# EAGLE board RDN (EAGLE 9.6.2)
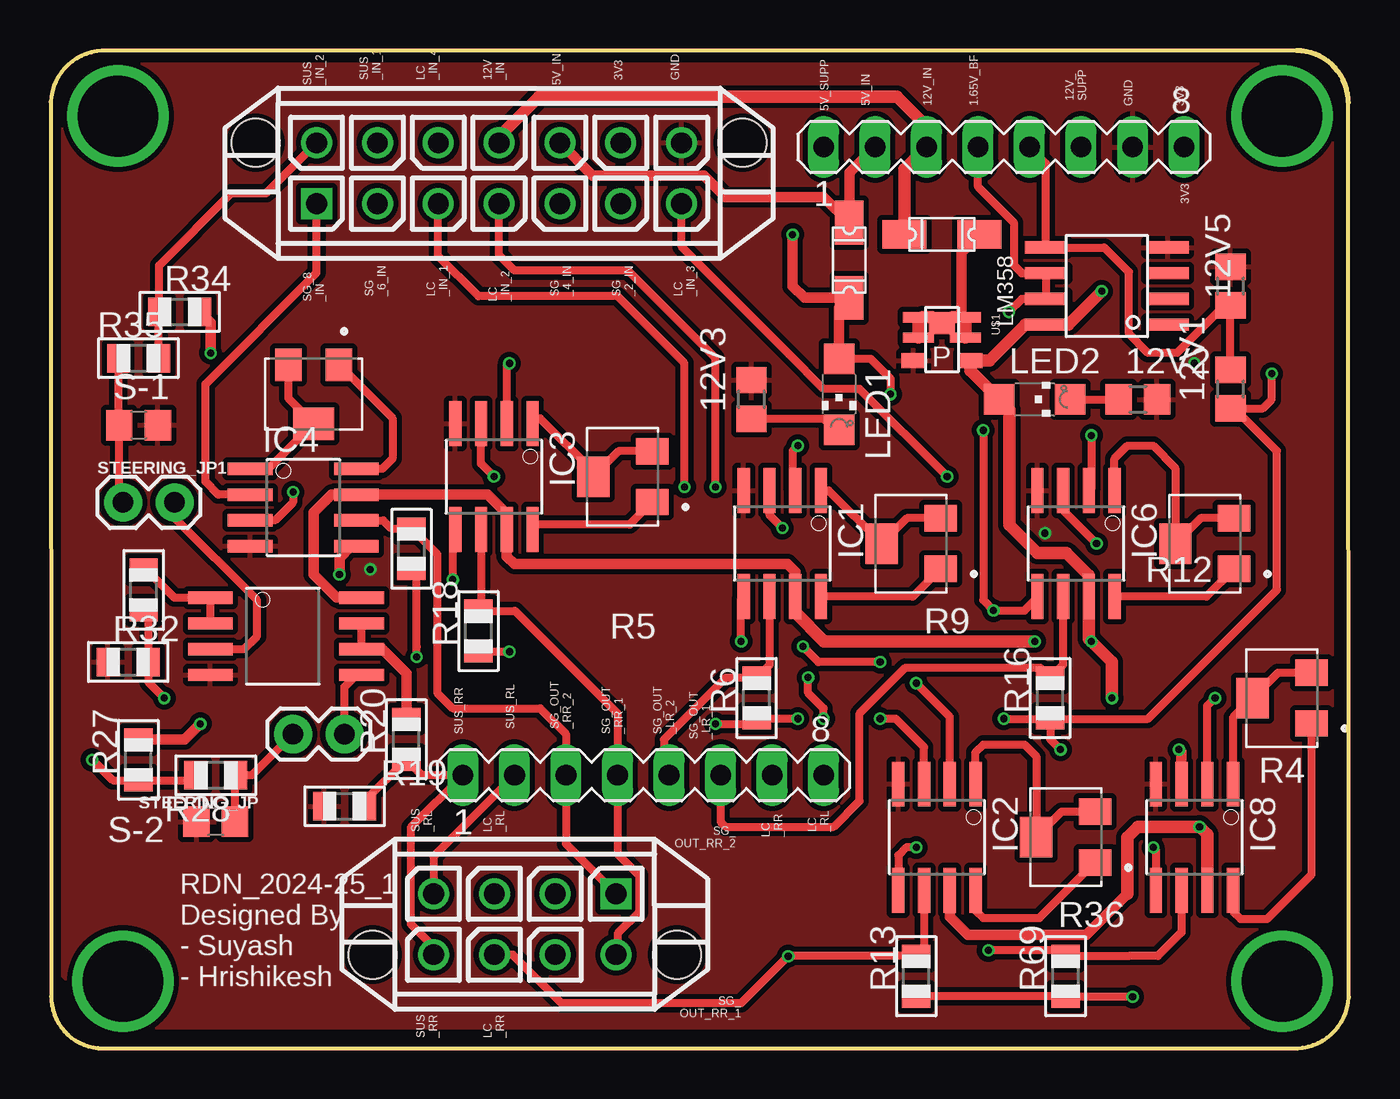
[diagram p0: board, top side]
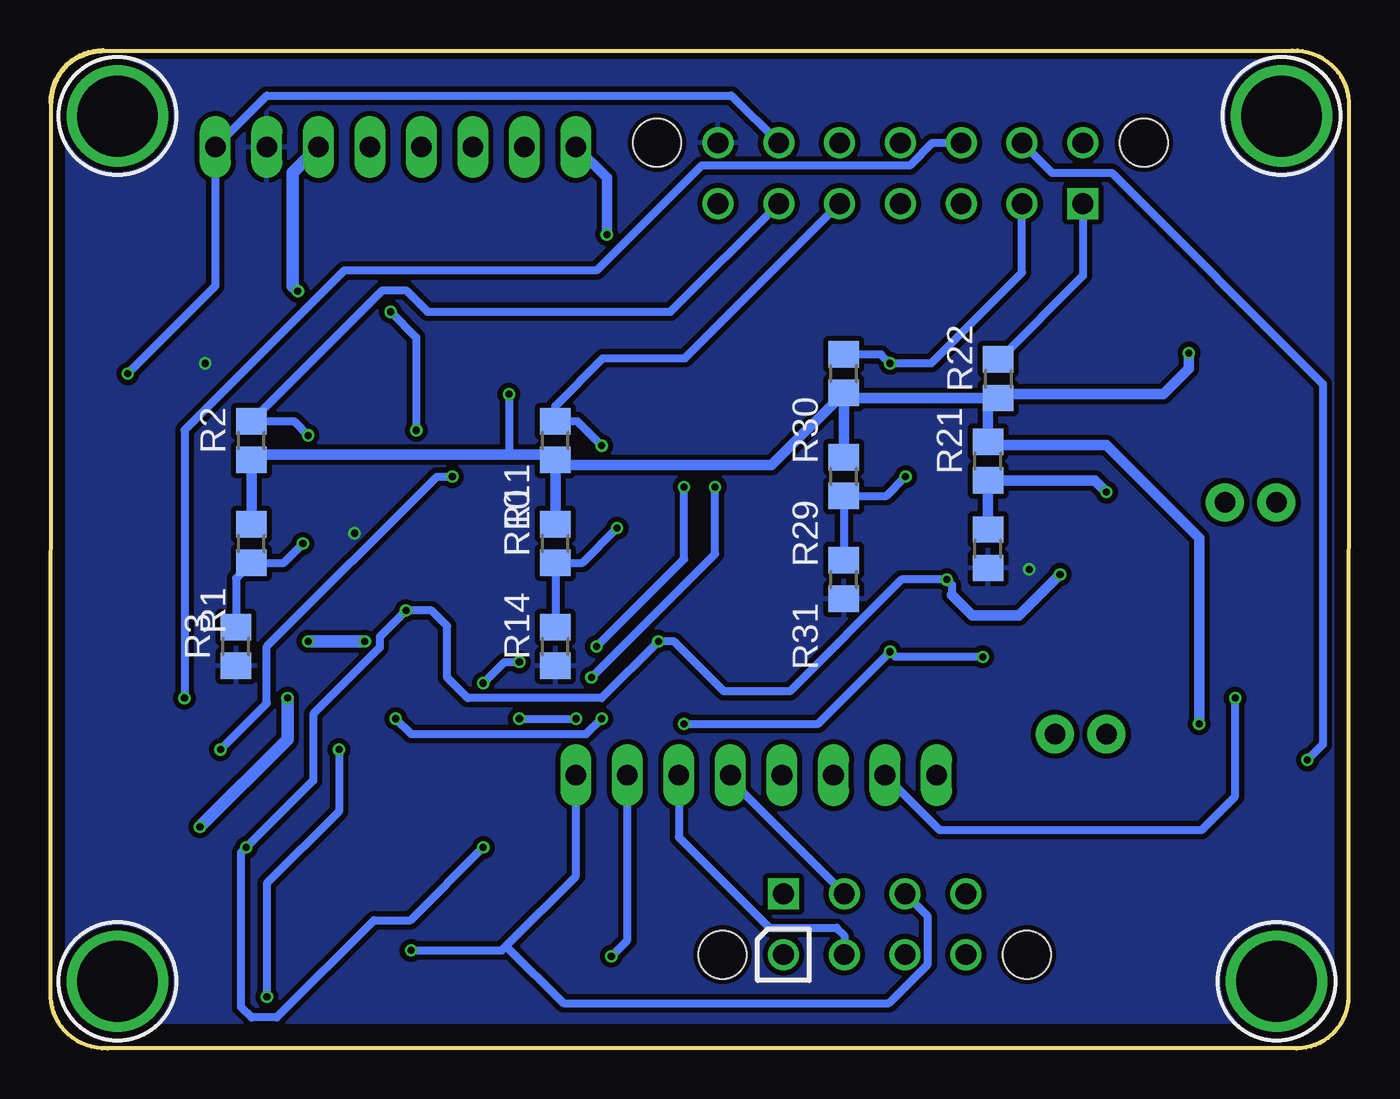
[diagram p1: board, bottom side, seen from below]

Size 64.01 x 49.2 mm. Coordinates in mm from the lower left corner, seen from the top.
Outline: 0,46.67 0.03,2.55 arc90 2.57,0 61.22,0 arc90 64.01,2.53 63.99,46.65 arc90 61.45,49.2 2.79,49.2 arc90 0,46.67
Copper layers (1*16): Top 0.035mm / dielectric 1.5mm / Bottom 0.035mm
Design rules "PCB_Power": minimum track width 5mil, minimum drill 10mil, track to track 5mil, track to pad 5mil, pad to pad 5mil, via to via 5mil, smd to smd 5mil, copper to edge 10mil, drill to drill 6mil, minimum pad ring 5mil, minimum via ring 5mil, stop-mask expansion 3mil, vias tented up to drill 0mil, thermal gap 10mil

## Footprints (pad centres in the part's own frame; a part is rotated, then mirrored left to right if it is on the bottom)
R0805 = smd 1.3 x 1.5: 1 -0.95,0; 2 0.95,0
1206L = smd 2.16 x 1.4: P$1 -1.85,0; P$2 1.85,0
SO08 = smd 0.61 x 2.21: 1 -1.905,-2.616; 2 -0.635,-2.616; 3 0.635,-2.616; 4 1.905,-2.616; 5 1.905,2.616; 6 0.635,2.616; 7 -0.635,2.616; 8 -1.905,2.616
CHIPLED_1206 = smd 1.5 x 1.5: A 0,-1.75; C 0,1.75
SOIC-8 = smd 0.6 x 2.1: 1 -1.905,-3; 2 -0.635,-3; 3 0.635,-3; 4 1.905,-3; 5 1.905,3; 6 0.635,3; 7 -0.635,3; 8 -1.905,3
TRIM_PVG5A103C03R00 = smd 1.6 x 1.3: 1 -1.45,1.25; 3 -1.45,-1.25 | smd 1.6 x 2: 2 1.45,0
R0805' = smd 1.1 x 1.4: 1 -1,0; 2 1,0
C0805 = smd 1.3 x 1.5: 1 -0.95,0; 2 0.95,0
1X02 = drill 1.016 pad 1.88: 1 0,0; 2 2.54,0
MA08-1 = drill 1.016 long: 1 -8.89,0; 2 -6.35,0; 3 -3.81,0; 4 -1.27,0; 5 1.27,0; 6 3.81,0; 7 6.35,0; 8 8.89,0
TSOP-6_PMOS = smd 0.5 x 1.92: 1 -1,-0.96; 6 -1,0.96 | smd 0.5 x 1.52: 2 0,-1.16; 5 0,1.16 | smd 0.635 x 1.27: D -0.5,0 | smd 0.75 x 1.2: G 1.13,-1.4; S 1.13,1.4
S08 = smd 0.61 x 2.21: 1 -1.905,-3.569; 2 -0.635,-3.569; 3 0.635,-3.569; 4 1.905,-3.569; 5 1.905,3.886; 6 0.635,3.886; 7 -0.635,3.886; 8 -1.905,3.886
44769-0801 = drill 1.02 square: P$1 -4.5,0 | drill 1.02: P$2 -1.5,0; P$3 1.5,0; P$4 4.5,0; P$5 -4.5,3; P$6 -1.5,3; P$7 1.5,3; P$8 4.5,3 | hole 2.36: 7.5,3; -7.5,3
44769-1401 = drill 1.02 square: P$1 -9,0 | drill 1.02: P$2 -6,0; P$3 -3,0; P$4 0,0; P$5 3,0; P$6 6,0; P$7 9,0; P$8 -9,3; P$9 -6,3; P$10 -3,3; P$11 0,3; P$12 3,3; P$13 6,3; P$14 9,3 | hole 2.36: 12,3; -12,3

## Placement (x,y rotation side)
12V1  10k  [R0805]  58.18,32.51 90 top
12V2  2k  [R0805]  53.61,32 0 top
12V3  6k  [R0805]  34.56,32 90 top
12V5  10k  [R0805]  58.18,37.59 90 top
F1  1206L  [1206L]  43.96,40.13 180 top
F5  1206L  [1206L]  39.38,38.86 90 top
IC1  INA122U  [SO08]  36.08,24.89 180 top
IC2  INA122U  [SO08]  43.7,10.41 180 top
IC3  INA122U  [SO08]  21.86,28.19 180 top
IC4  INA122U  [SO08]  12.46,26.67 270 top
IC6  INA122U  [SO08]  50.56,24.89 180 top
IC8  INA122U  [SO08]  56.4,10.41 180 top
LED1  [CHIPLED_1206]  38.88,32.26 180 top
LED2  [CHIPLED_1206]  48.53,32 270 top
LM358  LM358EDR2G  [SOIC-8]  52.08,37.59 90 top
R1  120  [R0805]  54.12,24.89 90 bottom
R2  120  [R0805]  54.12,29.97 90 bottom
R3  120  [R0805]  54.88,19.81 90 bottom
R4  PVG5A103C03R00  [TRIM_PVG5A103C03R00]  60.72,17.27 180 top
R5  PVG5A103C03R00  [TRIM_PVG5A103C03R00]  28.21,28.19 180 top
R6  1k  [R0805']  34.81,17.27 90 top
R7  PVG5A103C03R00  [TRIM_PVG5A103C03R00]  12.97,32.26 270 top
R9  PVG5A103C03R00  [TRIM_PVG5A103C03R00]  42.43,24.89 180 top
R10  120  [R0805]  39.13,24.89 90 bottom
R11  120  [R0805]  39.13,29.97 90 bottom
R12  PVG5A103C03R00  [TRIM_PVG5A103C03R00]  56.91,24.89 180 top
R13  1k  [R0805']  42.69,3.56 90 top
R14  120  [R0805]  39.13,19.81 90 bottom
R16  1k  [R0805']  49.29,17.27 90 top
R18  1k  [R0805']  21.1,20.57 90 top
R19  10k  [R0805']  14.49,11.94 0 top
R20  5k  [R0805']  17.54,15.24 90 top
R21  120  [R0805]  17.79,28.96 90 bottom
R22  120  [R0805]  17.29,33.02 90 bottom
R23  120  [R0805]  17.79,24.64 90 bottom
R26  1k  [R0805']  17.79,24.64 90 top
R27  300k  [R0805']  4.33,14.22 90 top
R28  1k  [R0805']  8.14,13.46 180 top
R29  120  [R0805]  24.91,28.19 90 bottom
R30  120  [R0805]  24.91,33.27 90 bottom
R31  120  [R0805]  24.91,23.11 90 bottom
R32  10k  [R0805']  3.82,19.05 0 top
R33  5k  [R0805']  4.59,22.61 90 top
R34  300k  [R0805']  6.36,36.32 0 top
R35  1k  [R0805']  4.33,34.04 0 top
R36  PVG5A103C03R00  [TRIM_PVG5A103C03R00]  50.05,10.41 180 top
R69  1k  [R0805']  50.05,3.56 90 top
S-1  1uF  [C0805]  4.33,30.73 0 top
S-2  1uF  [C0805]  8.14,11.18 180 top
STEERING_JP  STEERING_JP  [1X02]  11.95,15.49 0 top
STEERING_JP1  STEERING_JP  [1X02]  3.57,26.92 0 top
SV1  [MA08-1]  47,44.45 0 top
SV4  [MA08-1]  29.22,13.46 0 top
U$1  TSOP-6_PMOS  [TSOP-6_PMOS]  43.96,35.05 270 top
U$2  LMC6462  [S08]  11.44,20.32 270 top
X3  [44769-0801]  23.38,7.62 180 top
X4  [44769-1401]  22.11,41.66 0 top

## Library data of the parts
12V1-12V3 12V5 R1-R3 R10 R11 R14 R21-R23 R29-R31 = rcl; SPICEPREFIX: R
F1 F5 R6 R13 R16 R18 R26 R69 S-1 S-2 = IIT_BOMBAY_Racing
IC1-IC4 IC6 IC8 = burr-brown; MPN: INA122U; OC_FARNELL: 1212407; OC_NEWARK: 97K1918
LED1 = led
LED2 = led; SPICEPREFIX: L
LM358 R19 R20 R27 R28 R32-R35 STEERING_JP STEERING_JP1 = IIT_BOMBAY_Racing2
R4 R5 R7 R9 R12 R36 = PVG5A103C03R00; AVAILABILITY: In Stock; CHECK_PRICES: https://www.snapeda.com/parts/PVG5A103C03R00/Bourns/view-part/?ref=eda; DESCRIPTION: 10 kOhms 0.25W, 1/4W J Lead Surface Mount Trimmer Potentiometer Cermet 11.0 Turn Top Adjustment; MF: Bourns; MP: PVG5A103C03R00; PACKAGE: SMD-3 Bourns; PRICE: None; SNAPEDA_LINK: https://www.snapeda.com/parts/PVG5A103C03R00/Bourns/view-part/?ref=snap
SV1 SV4 = con-lstb; OC_FARNELL: unknown; OC_NEWARK: unknown
U$1 = TSOP-6_MOS
U$2 = IIT_BOMBAY_Racing (1)
X3 X4 = IIT_BOMBAY_Racing2 (1)

## Nets
1.65V_REF: 12V1.2 12V5.1 LM358.5 SV1.5
1.65V_REF_BF: IC1.5 IC2.5 IC3.5 IC4.5 IC6.5 IC8.5 LM358.6 LM358.7 SV1.4
3V3: 12V1.1 R6.1 R13.1 R16.1 R18.1 R26.1 R69.1 SV1.8 X4.P$13
5V_IN: F5.P$2 SV1.2 X4.P$12
5V_SUPPLY: F5.P$1 LED1.A R1.2 R2.1 R10.2 R11.1 R21.2 R22.1 R27.2 R29.2 R30.1 R34.2 SV1.1
12V_IN: F1.P$2 SV1.3 X4.P$11
12V_SUPPLY: IC1.7 IC2.7 IC3.7 IC4.7 IC6.7 IC8.7 LED2.A LM358.8 SV1.6 U$1.S U$2.8
GND: 12V2.2 12V3.2 12V5.2 IC1.4 IC2.4 IC3.4 IC4.4 IC6.4 IC8.4 LM358.4 R3.1 R14.1 R19.1 R23.1 R31.1 R32.1 S-1.2 S-2.2 SV1.7 U$1.G U$2.4 X4.P$14
LC_RL: IC8.6 R69.2 SV4.8 X3.P$3
LC_RR: IC2.6 R13.2 SV4.7 X3.P$7
LOADCELL_IN_1: IC2.3 X4.P$3
LOADCELL_IN_2: IC2.2 X4.P$4
LOADCELL_IN_3: IC8.3 X4.P$7
LOADCELL_IN_4: IC8.2 X4.P$10
N1: STEERING_JP1.2 U$2.3
N2: STEERING_JP.2 U$2.5
N$3: IC1.1 R9.2 R9.3
N$4: IC1.8 R9.1
N$5: 12V2.1 LED2.C
N$6: IC2.1 R36.2 R36.3
N$7: IC2.8 R36.1
N$12: IC3.1 R5.2 R5.3
N$13: IC3.8 R5.1
N$15: R20.2 U$2.6 U$2.7
N$16: R28.1 S-2.1 STEERING_JP.1
N$17: IC4.1 R7.2 R7.3
N$18: IC4.8 R7.1
N$20: R33.2 U$2.1 U$2.2
N$21: R35.1 S-1.1 STEERING_JP1.1
N$26: IC6.1 R12.2 R12.3
N$27: IC6.8 R12.1
N$29: 12V3.1 LED1.C
N$42: IC8.1 R4.2 R4.3
N$43: IC8.8 R4.1
N$100: F1.P$1 U$1.1 U$1.2 U$1.5 U$1.6 U$1.D
SG_1_IN: IC6.3 R1.1 R3.2
SG_2_IN: IC6.2 R2.2 X4.P$6
SG_3_IN: IC1.3 R10.1 R14.2
SG_4_IN: IC1.2 R11.2 X4.P$5
SG_5_IN: IC3.3 R29.1 R31.2
SG_6_IN: IC3.2 R30.2 X4.P$2
SG_7_IN: IC4.3 R21.1 R23.2
SG_8_IN: IC4.2 R22.2 X4.P$1
SG_OUT_LR_1: IC6.6 R16.2 SV4.6 X3.P$6
SG_OUT_LR_2: IC1.6 R6.2 SV4.5 X3.P$2
SG_OUT_RR_1: IC3.6 R18.2 SV4.4 X3.P$5
SG_OUT_RR_2: IC4.6 R26.2 SV4.3 X3.P$1
SUS_IN_1: R27.1 R28.2 X4.P$9
SUS_IN_2: R34.1 R35.2 X4.P$8
SUS_RL: R32.2 R33.1 SV4.2 X3.P$4
SUS_RR: R19.2 R20.1 SV4.1 X3.P$8

## Tracks (layer width: path | path; a pad name or v marks a point on that pad's centre or on a via)
1.65V_REF
  Top 0.406: 12V1.2 12V5.1 57.89,36.64 55.54,34.29 54.12,34.29 53.17,35.24 53.17,38.28 51.95,39.5 LM358.5 49.08,43.64 SV1.5
1.65V_REF_BF  (via drill 0.35)
  Top 0.406: v19.83,23.11 19.83,25.45 IC3.5 | v34.05,20.07 34.05,22.15 IC1.5 | v54.37,9.91 54.5,9.78 IC8.5 | v42.69,9.91 42.18,9.91 41.8,9.53 IC2.5 | SV1.4 45.73,42.49 47.5,40.72 47.5,38.62 47.89,38.23 LM358.6 LM358.7 47.89,36.96 v47.26,36.32 | v45.99,30.48 45.99,22.1 v46.5,21.59 48.02,21.59 48.65,22.23 IC6.5
  Top 0.508: v14.24,23.37 14.24,24.18 14.82,24.77 IC4.5
  Bottom 0.406: 19.57,22.35 19.57,22.86 v19.83,23.11 22.05,23.11 27.56,17.6 30.82,17.6 33.29,20.07 v34.05,20.07 36.84,17.27 43.45,17.27 44.46,18.29 44.46,20.83 45.23,21.59 v46.5,21.59 47.79,20.29 47.79,19.76 51.07,16.49 51.07,13.21 v54.37,9.91 54.62,9.65 54.62,2.03 54.12,1.52 52.87,1.52 48.07,6.32 46.27,6.32 v42.69,9.91 | v47.26,36.32 45.99,35.05 v45.99,30.48
  Bottom 0.508: 19.57,22.35 18.56,21.34 16.27,21.34 v14.24,23.37
3V3  (via drill 0.35)
  Top 0.406: v18.05,19.3 18.05,19.81 18.05,23.38 R26.1 | R18.1 22.6,19.57 v22.62,19.56 | v32.78,16 34.54,16 R6.1 36.83,16.27 v36.84,16.26 | v47,16.26 49.27,16.26 R16.1 | R16.1 49.29,15.24 v49.8,14.73 | v53.35,2.54 50.07,2.54 R69.1 R13.1 | R16.1 49.31,16.26 54.12,16.26 60.47,22.61 60.47,29.46 58.37,31.56 12V1.1 59.77,31.56 60.21,32 v60.21,33.27
  Bottom 0.406: v32.78,16 26.18,16 v22.62,19.56 22.37,19.3 v18.05,19.3 | v36.84,16.26 37.61,15.49 46.24,15.49 v47,16.26 | v49.8,14.73 49.8,11.68 53.35,8.13 v53.35,2.54 | v60.21,33.27 55.89,37.59 SV1.8 53.35,46.99 30.45,46.99 X4.P$13
5V_IN
  Top 0.508: SV1.2 39.38,43.18 F5.P$2 38.11,41.98 33.29,41.98 32.23,43.04 26.73,43.04 X4.P$12
5V_SUPPLY  (via drill 0.35)
  Top 0.406: LED1.A 40.43,34.01 41.42,33.02 v41.42,32.26
  Top 0.508: LED1.A 38.88,36.5 F5.P$1 37.17,37.01 36.59,37.59 v36.59,40.13 | v7.38,16 6.62,15.24 4.35,15.24 R27.2 | v7.89,34.29 7.89,35.8 R34.2
  Bottom 0.406: v41.42,32.26 41.42,29.28
  Bottom 0.508: R30.1 R29.2 | R11.1 R10.2 | R22.1 17.79,31.56 R21.2 17.63,29.74 11.95,29.74 7.38,25.17 v7.38,16 | R1.2 R2.1 53.86,29.28 41.42,29.28 39.38,29.28 R11.1 | R30.1 24.65,32.07 R22.1 | R30.1 28.46,28.77 38.88,28.77 R11.1 | R22.1 17.29,32.26 9.16,32.26 7.89,33.53 v7.89,34.29 | v36.59,40.13 36.59,42.93 SV1.1
12V_IN
  Top 0.61: F1.P$2 42.11,43.36 SV1.3 43.19,45.47 41.72,46.94 24.09,46.94 22.11,44.96 X4.P$11
12V_SUPPLY  (via drill 0.35)
  Top 0.508: IC1.7 36.72,23.5 36.34,23.88 22.87,23.88 22.49,24.26 IC3.7 22.49,26.36 21.55,27.3 IC4.7 13.86,27.3 12.97,26.42 12.97,23.37 14.11,22.23 U$2.8 | IC2.7 44.34,6.48 45.23,5.59 51.07,5.59 53.1,7.62
  Top 0.61: v51.83,37.34 50.18,35.69 LM358.8 48.07,35.69 46.3,33.92 U$1.S 45.36,33.43 LED2.A 47.29,31.5 47.29,25.8 48.67,24.42 50.09,24.42 51.19,23.32 IC6.7 51.19,20.19 v51.32,20.07 52.34,19.05 v52.34,17.27 | IC1.7 36.72,21.49 38.14,20.07 v48.53,20.07 | IC8.7 57.04,10.54 v56.66,10.92 53.61,10.92 53.1,10.41 53.1,7.62
  Bottom 0.61: v51.83,37.34 52.08,37.59 52.08,43.18 SV1.6 | v51.32,20.07 v48.53,20.07 | v52.34,17.27 52.34,15.24 v56.66,10.92
GND  (via drill 0.35)
  other vias: 49.04,25.4 56.4,33.78 15.76,23.62
  pour Bottom (isolate 0.254): 63.22,3.81 63.22,46.19 60.68,48.73 3.33,48.73 0.79,46.19 0.79,3.81 3.33,1.27 60.68,1.27
  pour Top (isolate 0.254): 63.22,3.56 63.22,45.99 60.68,48.53 3.1,48.53 0.56,45.99 0.56,3.56 3.1,1.02 60.68,1.02
LC_RL  (via drill 0.35)
  Top 0.406: v46.24,4.83 49.78,4.83 R69.2 52.85,4.56 53.17,4.56 54.61,4.56 55.77,5.71 IC8.6
  Bottom 0.406: v46.24,4.83 41.78,4.83 41.52,5.08 | X3.P$3 20.76,6.5 20.76,4.14 22.68,2.22 38.73,2.22 41.52,5.01 41.52,5.08 | 41.52,5.08 38.11,8.49 SV4.8
LC_RR  (via drill 0.35)
  Top 0.406: IC2.6 43.07,4.94 R13.2 36.38,4.56 v36.37,4.54 34.05,2.22 25.19,2.22 22.79,4.62 X3.P$7
  Bottom 0.406: v36.37,4.54 35.57,5.33 SV4.7
LOADCELL_IN_1  (via drill 0.35)
  Top 0.406: IC2.3 43.07,14.86 41.67,16.26 v40.91,16.26 | v38.11,16.26 38.11,16.76 37.35,17.53 v37.35,18.29 | v31.26,27.69 31.26,33.78 27.95,37.08 21.1,37.08 19.11,39.07 X4.P$3
  Bottom 0.406: v40.91,16.26 v38.11,16.26 | v37.35,18.29 31.26,24.38 v31.26,27.69
LOADCELL_IN_2  (via drill 0.35)
  Top 0.406: IC2.2 44.34,16.36 v42.69,18.01 | v40.91,19.05 37.86,19.05 v37.1,19.81 | v32.78,27.69 32.78,34.04 28.46,38.35 22.87,38.35 22.11,39.12 X4.P$4
  Bottom 0.406: v42.69,18.01 41.64,19.05 v40.91,19.05 | v37.1,19.81 32.78,24.13 v32.78,27.69
LOADCELL_IN_3  (via drill 0.35)
  Top 0.406: v44.21,28.19 39.89,32.51 38.11,32.51 36.4,34.23 36.4,34.25 31.11,39.54 X4.P$7
  Top 0.508: IC8.3 55.77,14.6 v55.64,14.73
  Bottom 0.406: v55.64,14.73 53.35,17.02 53.35,19.81 44.97,28.19 v44.21,28.19
LOADCELL_IN_4  (via drill 0.35)
  Top 0.406: IC8.2 57.04,16.89 v57.42,17.27
  Bottom 0.406: X4.P$10 20.53,44.66 21.65,43.53 31.92,43.53 37.1,38.35 49.54,38.35 57.42,30.48 v57.42,17.27
N1
  Top 0.406: U$2.3 9.54,19.69 10.17,20.32 10.17,22.1 6.11,26.16 STEERING_JP1.2
N2
  Top 0.406: U$2.5 15.08,18.42 14.49,17.83 STEERING_JP.2
N$3
  Top 0.406: R9.3 42.23,26.14 R9.2 38.37,27.51 IC1.1
N$4
  Top 0.406: R9.1 42.52,22.28 IC1.8
N$5
  Top 0.406: LED2.C 12V2.1
N$6
  Top 0.406: R36.3 49.85,11.66 R36.2 48.6,14.4 48.02,14.99 45.99,14.99 45.61,14.6 IC2.1
N$7
  Top 0.406: IC2.8 45.61,6.81 45.99,6.43 48.76,6.43 R36.1
N$9  (via drill 3.98)
  other vias: 60.72,3.3
N$11  (via drill 3.98)
  other vias: 3.32,45.97
N$12
  Top 0.406: R5.3 28.01,29.44 R5.2 26.76,28.45 24.14,31.06 24.02,31.06 IC3.1
N$13
  Top 0.406: R5.1 28.55,25.83 24.02,25.83 IC3.8
N$14  (via drill 3.98)
  other vias: 60.72,45.97
N$15
  Top 0.406: U$2.6 U$2.7
  Top 0.508: U$2.6 16.35,19.69 17.54,18.49 R20.2
N$16
  Top 0.406: STEERING_JP.1 9.92,13.46 R28.1 9.09,13.41 S-2.1
N$17
  Top 0.406: R7.3 11.72,32.06 R7.2 10.73,28.57 IC4.1
N$18
  Top 0.406: R7.1 16.85,31.07 16.85,29.08 16.35,28.57 IC4.8
N$20
  Top 0.406: U$2.2 U$2.1 6.1,22.23 4.72,23.61 R33.2
N$21
  Top 0.406: R35.1 3.33,30.78 S-1.1 3.38,27.11 STEERING_JP1.1
N$23  (via drill 3.98)
  other vias: 3.57,3.3
N$26
  Top 0.406: R12.3 56.71,26.14 R12.2 55.46,28.63 54.37,29.72 53.1,29.72 52.46,29.08 IC6.1
N$27
  Top 0.406: R12.1 56.99,22.28 IC6.8
N$29
  Top 0.406: LED1.C 38.77,30.4 38.11,31.05 12V3.1
N$42
  Top 0.406: R4.3 60.52,18.52 R4.2 58.31,16.31 IC8.1
N$43
  Top 0.406: R4.1 62.17,8.56 59.99,6.38 58.69,6.38 58.31,6.76 IC8.8
N$100
  Top 0.508: U$1.6 44.92,39.24 F1.P$1
  Top 0.61: U$1.2 42.8,35.85 U$1.1 43.46,36.05 U$1.D 44.46,36.05 U$1.6 45.12,35.85 U$1.5
SG_1_IN  (via drill 0.35)
  Top 0.406: v51.58,24.89 49.92,26.54 IC6.3
  Bottom 0.406: R3.2 54.88,23.18 R1.1 52.53,23.94 v51.58,24.89
SG_2_IN  (via drill 0.35)
  Top 0.406: v51.32,30.23 51.32,27.64 IC6.2
  Bottom 0.406: v51.32,30.23 52.02,30.92 R2.2 47.65,37.39 46.5,37.39 45.43,36.32 33.45,36.32 X4.P$6
SG_3_IN  (via drill 0.35)
  Top 0.406: v36.08,25.65 35.45,26.29 IC1.3
  Bottom 0.406: R14.2 R10.1 37.79,23.94 v36.08,25.65
SG_4_IN  (via drill 0.35)
  Top 0.406: v36.84,29.72 36.59,29.46 36.59,27.64 IC1.2
  Bottom 0.406: v36.84,29.72 38.05,30.92 R11.2 39.13,31.68 36.78,34.04 32.73,34.04 X4.P$5
SG_5_IN  (via drill 0.35)
  Top 0.406: v21.86,28.19 21.22,28.83 IC3.3
  Bottom 0.406: R31.2 R29.1 22.81,27.24 v21.86,28.19
SG_6_IN  (via drill 0.35)
  Top 0.406: v22.62,33.78 22.49,33.66 IC3.2
  Bottom 0.406: R30.2 23.06,34.22 v22.62,33.78 20.59,33.78 16.11,38.26 X4.P$2
SG_7_IN  (via drill 0.35)
  Top 0.406: v11.95,27.43 11.95,26.92 11.06,26.04 IC4.3
  Bottom 0.508: v11.95,27.43 12.53,28.01 R21.1 R23.2
SG_8_IN
  Top 0.406: IC4.2 8.27,27.3 7.63,27.94 7.63,32.77 13.11,38.24 X4.P$1
  Bottom 0.406: X4.P$1 13.11,38.1 17.24,33.97 R22.2
SG_OUT_LR_1
  Top 0.406: IC6.6 49.92,18.91 R16.2 48.78,18.78 42.16,18.78 39.89,16.51 39.89,12.19 38.62,10.92 33.29,10.92 33.03,11.18 SV4.6
  Bottom 0.406: X3.P$6 24.88,5.56 25.26,5.95 28.57,5.95 33.03,10.41 SV4.6
SG_OUT_LR_2
  Top 0.406: IC1.6 35.45,18.91 R6.2 33.29,18.27 30.24,15.22 30.24,13.72 SV4.5
  Bottom 0.406: X3.P$2 30.49,13.23 SV4.5
SG_OUT_RR_1
  Top 0.406: IC3.6 21.22,21.7 R18.2 22.89,21.57 27.95,16.51 SV4.4 27.95,9.58 29,8.53 29,6.71 27.95,5.66 27.95,4.69 X3.P$5
SG_OUT_RR_2
  Top 0.406: X3.P$1 25.41,10.09 SV4.3 25.41,15.49 24.14,16.76 19.83,16.76 19.06,17.53 19.06,24.37 R26.2 16.79,25.64 16.4,26.04 IC4.6
SUS_IN_1  (via drill 0.35)
  Top 0.406: R28.2 7.13,13.45 7.13,13.48 6.74,13.22 R27.1 3.06,13.22 2.06,14.22 v2.05,14.22
  Bottom 0.406: X4.P$9 14.64,43.18 11.7,43.18 1.28,32.77 1.28,14.99 v2.05,14.22
SUS_IN_2
  Top 0.406: X4.P$8 10.62,42.16 8.9,42.16 5.35,38.61 5.35,36.34 R34.1 5.33,36.29 R35.2
SUS_RL  (via drill 0.35)
  Top 0.406: SV4.2 18.88,9.47 X3.P$4 | R33.1 4.82,21.37 R32.2 4.82,18.05 v5.6,17.27
  Bottom 0.406: SV4.2 20.18,10.77 7.26,10.77 5.6,12.42 v5.6,17.27
SUS_RR
  Top 0.406: X3.P$8 18.88,5.01 17.76,6.13 17.76,10.89 SV4.1 18.32,13.46 R20.1 15.49,12.19 R19.2

## Text on the board
tNames: SUS / _IN_1 | LC / _IN_4 | 12V / _IN | 3V3 | GND | SUS / _IN_2 | 5V_IN | 12V_ / SUPP | 5V_SUPP | 5V_IN | 12V_IN | 1.65V_BF | GND | 3V3 | 3V3 | SG_8 / _IN | SG / _6_IN | LC / _IN_1 | LC / _IN_2 | SG / _4_IN | SG / _2_IN | LC / _IN_3 | SUS_RL | SG_OUT / _RR_2 | SUS_RR | SG_OUT / _RR_1 | SG_OUT / _LR_2 | SG_OUT / _LR_1 | SG_ / OUT_RR_2 | SUS / _RL | LC / _RL | LC / _RR | LC / _RL | SG_ / OUT_RR_1 | RDN_2024-25_1 / Designed By / - Suyash / - Hrishikesh | SUS / _RR | LC / _RR